# EAGLE board w15_nk (EAGLE 8.0.1)
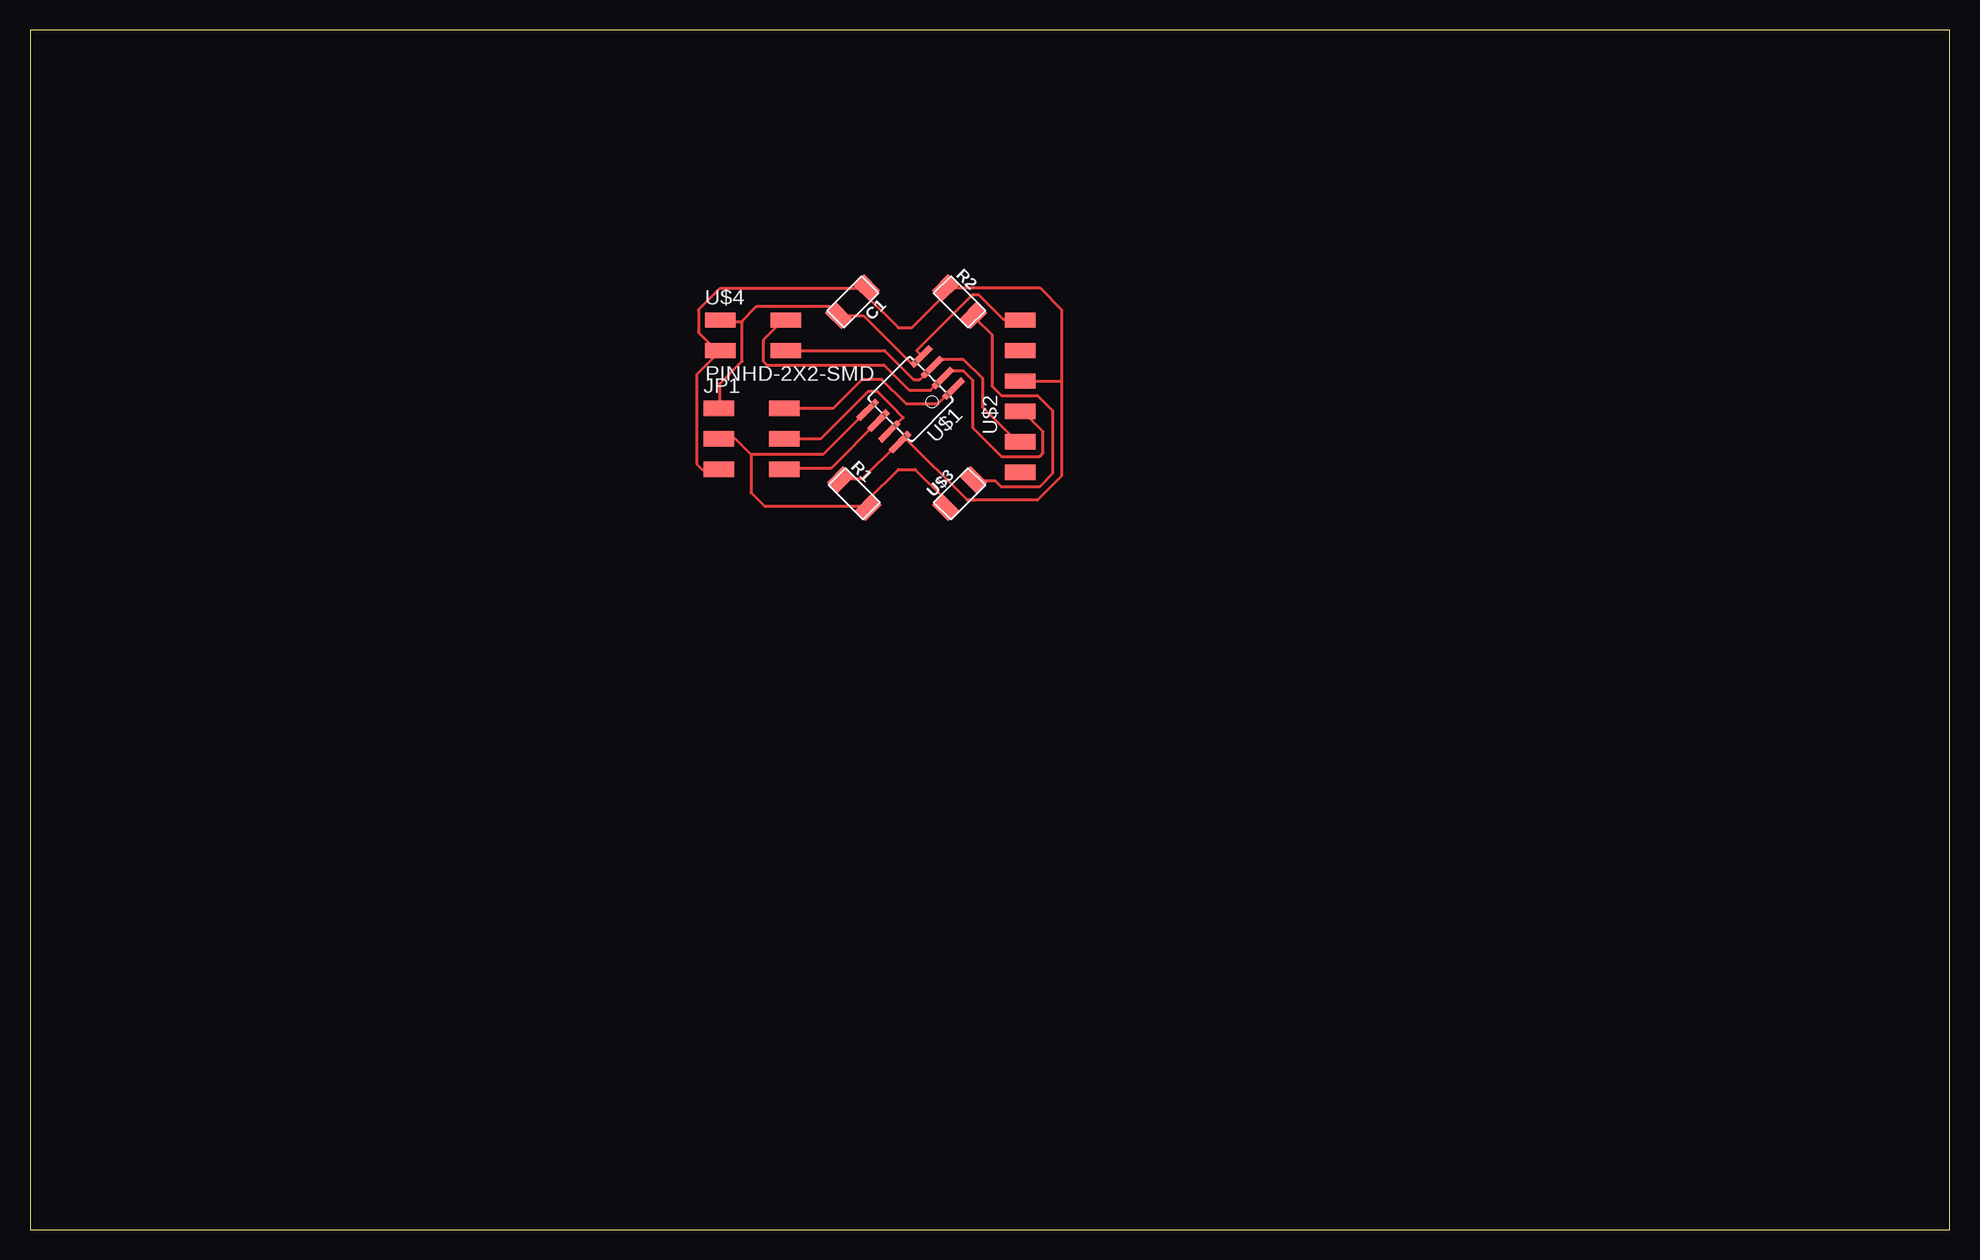
[diagram p0: board, top side]

Size 160 x 100 mm. Coordinates in mm from the lower left corner, seen from the top.
Outline: 0,0 160,0 160,100 0,100 0,0
Copper layers (1*16): Top 0.035mm / dielectric 1.5mm / Bottom 0.035mm
Design rules "default *": minimum track width 10mil, minimum drill 24mil, track to track 0.4mm, track to pad 0.4mm, pad to pad 0.4mm, via to via 0.4mm, smd to smd 0.4mm, copper to edge 40mil, drill to drill 8mil, minimum pad ring 10mil, minimum via ring 8mil, stop-mask expansion 4mil, vias tented up to drill 0mil, thermal gap 10mil

## Footprints (pad centres in the part's own frame; a part is rotated, then mirrored left to right if it is on the bottom)
C1206FAB = smd 1.27 x 1.905: 1 -1.651,0; 2 1.651,0
2X03SMD = smd 2.54 x 1.27: 1 -2.54,2.54; 2 2.92,2.54; 3 -2.54,0; 4 2.92,0; 5 -2.54,-2.54; 6 2.92,-2.54
R1206FAB = smd 1.27 x 1.905: 1 -1.651,0; 2 1.651,0
SOIC8 = smd 0.5 x 2.2: 1 -1.905,-3.154; 2 -0.645,-3.154; 3 0.625,-3.154; 4 1.895,-3.154; 5 1.905,3.154; 6 0.635,3.154; 7 -0.635,3.154; 8 -1.905,3.154
1X06SMD = smd 2.54 x 1.27: 1 0,6.35; 2 0,3.81; 3 0,1.27; 4 0,-1.27; 5 0,-3.81; 6 0,-6.35
LED1206FAB = smd 1.27 x 1.905: 1 -1.651,0; 2 1.651,0
2X02SMD = smd 2.54 x 1.27: 1 -2.54,1.27; 2 2.92,1.27; 3 -2.54,-1.27; 4 2.92,-1.27

## Placement (x,y rotation side)
C1  1uf  [C1206FAB]  68.58,77.34 225 top
JP1  [2X03SMD]  59.94,65.91 0 top
R1  10K  [R1206FAB]  68.71,61.34 315 top
R2  1K  [R1206FAB]  77.47,77.34 315 top
U$1  ATTINY45SI  [SOIC8]  73.41,69.22 135 top
U$2  FTDI-SMD-HEADER  [1X06SMD]  82.55,69.47 0 top
U$3  LEDFAB1206  [LED1206FAB]  77.47,61.34 45 top
U$4  PINHD-2X2-SMD  [2X02SMD]  60.07,74.55 0 top

## Library data of the parts
C1 JP1 R1 R2 U$1-U$4 = fab

## Nets
GND: C1.2 JP1.1 U$1.4 U$2.1 U$4.1
N$1: U$1.2 U$2.4 U$4.2
N$2: U$1.3 U$2.5 U$4.4
N$3: JP1.4 U$1.7
N$4: JP1.3 R1.2 U$1.5 U$3.1
N$6: JP1.2 U$1.1
N$7: JP1.6 U$1.6
N$8: R2.2 U$3.2
VCC: C1.1 JP1.5 R1.1 R2.1 U$1.8 U$2.3 U$4.3

## Tracks (layer width: path | path; a pad name or v marks a point on that pad's centre or on a via)
GND
  Top 0.254: JP1.1 57.47,68.58 57.47,70.48 59.37,72.39 59.37,75.63 59.31,75.69 | 57.63,75.88 U$4.1 57.66,75.69 59.31,75.69 | C1.2 67.47,76.04 | U$2.1 82.55,75.88 81.12,75.88 79.06,77.95 78.58,77.95 73.9,73.26 74.3,72.87 U$1.4 73.65,72.14 73.53,72.14 69.49,76.18 C1.2 | 59.31,75.69 60.58,76.96 66.63,76.96 C1.2
N$1
  Top 0.254: U$4.2 62.87,75.88 61.12,74.14 61.12,72.39 61.44,72.07 71.18,72.07 73.28,69.98 75.08,69.98 U$1.2 76.09,71.01 76.68,71.6 77.79,71.6 78.58,70.8 78.58,66.83 80.96,64.45 84.14,64.45 84.45,64.77 84.45,66.52 82.87,68.1 82.55,68.1 U$2.4
N$2
  Top 0.254: U$1.3 75.09,71.75 | U$2.5 82.55,65.72 82.23,65.72 79.38,68.58 79.38,70.96 77.79,72.55 75.88,72.55 75.25,71.91 U$1.3 | U$4.4 71.25,73.28 73.66,70.87 74.17,70.87 U$1.3
N$3
  Top 0.254: 71.75,66.67 U$1.7 72.77,67.68 72.77,67.69 72.23,68.23 72.23,68.26 70.64,69.85 69.85,69.85 65.91,65.91 JP1.4
N$4
  Top 0.254: 70.01,60.17 R1.2 | 76.2,60.17 U$3.1 76.3,60.86 73.79,63.37 72.39,63.37 69.87,60.86 R1.2 | 69.69,68.26 U$1.5 66.11,64.61 60.1,64.61 | 57.47,65.88 JP1.3 58.8,65.91 60.1,64.61 | R1.2 69.85,60.33 61.21,60.33 60.1,61.44 60.1,64.61
N$6
  Top 0.254: U$1.1 76.96,70.1 75.69,68.83 73.03,68.83 70.99,70.87 69.34,70.87 66.93,68.45 JP1.2
N$7
  Top 0.254: 70.64,67.31 U$1.6 66.79,63.5 62.87,63.5 JP1.6
N$8
  Top 0.254: U$3.2 78.74,62.39 80.49,62.39 80.96,61.91 84.14,61.91 85.25,63.02 85.25,68.26 83.98,69.53 80.96,69.53 80.17,70.33 80.17,74.61 78.74,76.04 R2.2
VCC
  Top 0.254: 57.31,63.5 JP1.5 56.01,63.37 55.56,63.82 55.56,71.28 57.47,73.18 U$4.3 57.31,73.18 55.72,74.77 55.72,76.68 57.47,78.42 69.69,78.42 C1.1 | R1.1 67.63,62.55 69.37,62.55 72.39,65.56 U$1.8 | 69.85,78.58 C1.1 | 76.2,78.58 R2.1 76.83,78.51 | 72.55,65.56 U$1.8 | 76.83,78.51 84.18,78.51 85.98,76.71 85.98,70.74 | U$2.3 85.98,70.74 | 85.98,70.74 85.98,62.8 83.98,60.8 78.74,60.8 78.58,60.8 78.14,60.8 72.9,66.04 72.9,66.01 U$1.8 | C1.1 69.75,77.83 72.39,75.18 73.51,75.18 76.83,78.51